# Altium PCB QV-601-Contril.pcbdoc (part 2 of 2)
Units mm, origin at the board's own origin, x right, y up, seen from the top; angles counter-clockwise.
Board outline 150.03 x 60.03 mm, 2 copper layers (TOP, BOTTOM), stack 0.264 mm thick; 44 components, 19 nets, 132 pads, 668 vias.
Unrouted connection lines stored in the file: 3.
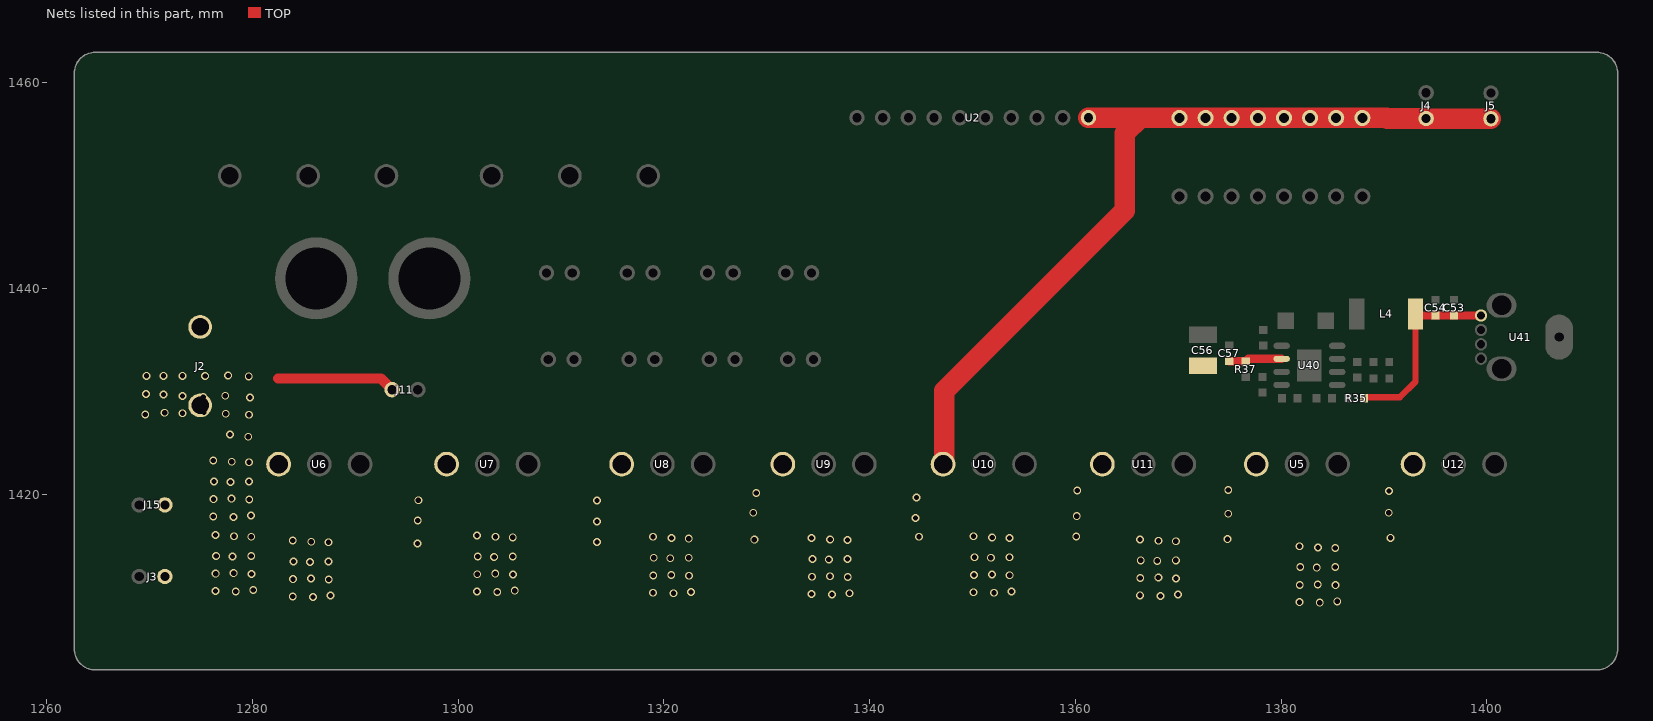
[diagram p2: the nets of this part, all layers, seen from the top]

## Via types
v1: diameter 0.762, hole 0.508, TOP to BOTTOM, 661 vias
v2: diameter 0.54, hole 0.254, TOP to BOTTOM, 7 vias

## Nets (pads, with @x,y where several pads share a name; then routed paths per layer and width w, separated by ;. In a path a pad name is that pad's centre, name@x,y a point inside that pad or via, vN(x,y) a via of type N, cw(c..) or ccw(c..) an arc to the next point about the centre after c; other vN are vias at no path point) (continued)
V+: ?.1 ?.2 ?.3 ?.4 ?.5 ?.6 ?.7 ?.8 C56.1 C57.1 J2.1 J2.2 J3.1 J4.1 J5.1 J11.2 J15.1 R37.2 U2.1 U5.1 U6.1 U7.1 U8.1 U9.1 U10.1 U11.1 U12.1 U40.2 | length 97.5
  TOP w0.8: C57.1@1374.973,1432.939 R37.2@1376.573,1432.939 1376.801,1433.167 U40.2@1380.053,1433.167
  TOP w1: 1282.491,1431.262 1292.488,1431.262 J11.2@1293.58,1430.17
  TOP w2: U10.1@1347.137,1422.931 1347.261,1423.056 1347.261,1430.043 1364.787,1447.569 1364.787,1455.093 1366.281,1456.586 ; U2.1@1361.27,1456.612 1361.295,1456.586 1366.281,1456.586 ; J5.1@1400.398,1456.51 1394.124,1456.51 J4.1@1394.099,1456.535 1390.342,1456.535 1390.291,1456.586 ?.1@1387.901,1456.586 ?.3@1382.821,1456.586 1366.281,1456.586
  other v1: 1383.765,1409.466 1381.784,1409.517 1385.467,1409.593 1285.899,1410.025 1283.918,1410.076 1368.271,1410.127 1287.601,1410.152 1366.29,1410.177 1336.343,1410.254 1369.973,1410.254 1334.362,1410.304 1320.925,1410.381 1338.045,1410.381 1318.944,1410.431 1352.091,1410.431 1350.11,1410.482 1303.806,1410.508 1322.627,1410.508 1278.38,1410.558 1301.825,1410.558 1353.793,1410.558 1276.399,1410.609 1305.508,1410.635 1280.082,1410.685 1385.289,1411.168 1381.809,1411.193 1383.562,1411.244 1287.423,1411.727 1283.943,1411.752 1285.696,1411.803 1369.795,1411.828 1366.315,1411.854 1368.068,1411.905 1337.867,1411.955 1334.387,1411.981 1336.14,1412.032 1322.449,1412.082 1318.97,1412.108 1353.615,1412.133 1320.722,1412.159 1350.135,1412.159 1305.33,1412.209 1351.888,1412.209 1301.85,1412.235 1279.904,1412.26 1276.425,1412.286 1303.603,1412.286 1278.177,1412.336 1383.46,1412.87 1381.86,1412.921 1385.264,1412.921 1285.594,1413.429 1283.994,1413.479 1287.397,1413.479 1367.966,1413.53 1366.366,1413.581 1369.77,1413.581 1336.038,1413.657 1334.438,1413.708 1337.842,1413.708 1320.621,1413.784 1319.02,1413.835 1322.424,1413.835 1351.786,1413.835 1350.186,1413.886 1353.59,1413.886 1303.501,1413.911 1278.076,1413.962 1301.901,1413.962 1305.304,1413.962 1276.475,1414.013 1279.879,1414.013 1385.264,1414.775 1383.587,1414.826 1381.784,1414.953 1296.055,1415.21 1287.397,1415.334 1313.505,1415.362 1285.721,1415.384 1369.77,1415.435 1368.093,1415.486 1283.918,1415.511 1337.842,1415.562 1328.795,1415.591 1336.165,1415.613 1366.29,1415.613 1374.795,1415.641 1322.424,1415.689 1320.748,1415.74 1334.362,1415.74 1353.59,1415.74 1390.644,1415.768 1351.913,1415.791 1305.304,1415.816 1279.879,1415.867 1303.628,1415.867 1318.944,1415.867 1344.797,1415.87 1360.088,1415.895 1278.203,1415.918 1350.11,1415.918 1301.825,1415.994 1276.399,1416.045 1313.505,1417.343 1296.08,1417.445 1344.467,1417.699 1278.173,1417.8 1276.192,1417.851 1360.139,1417.877 1279.875,1417.927 1374.871,1418.105 1328.694,1418.207 1390.467,1418.207 1313.505,1419.401 1296.131,1419.426 1279.697,1419.502 1276.217,1419.528 1277.97,1419.578 1344.569,1419.68 1328.973,1420.137 1390.492,1420.315 1360.19,1420.366 1374.871,1420.417 1277.868,1421.204 1276.268,1421.255 1279.672,1421.255 1279.672,1423.109 1277.995,1423.16 1276.192,1423.287 1279.596,1425.598 1277.818,1425.827 1279.672,1427.732 1269.588,1427.757 1277.411,1427.833 1273.195,1427.884 1271.468,1427.935 1275.303,1427.96 1279.773,1429.408 1275.227,1429.459 1273.195,1429.561 1277.36,1429.586 1271.366,1429.713 1269.664,1429.738 1279.646,1431.466 1275.405,1431.491 1269.715,1431.516 1271.366,1431.516 1273.195,1431.516 1277.64,1431.542
VCC_5V: C53.1 C54.1 L4.2 R35.2 U41.1 | length 18.7
  TOP w0.6: R35.2@1388.054,1429.332 1388.155,1429.434 1391.559,1429.434 1393.068,1430.943 L4.2@1393.068,1437.536
  TOP w0.8: L4.2@1393.068,1437.536 1393.22,1437.384 C54.1@1395.013,1437.384 C53.1@1396.817,1437.384 U41.1@1399.433,1437.384
pads on no net: U41.2 U41.3

## Polygon pours and split planes (outlines as drawn)
no net on Bottom Solder (solid): 1269.005,1406.949 ccw(c1266.705,1406.949) 1266.705,1409.249 ccw(c1266.705,1406.949) 1264.405,1406.949 ccw(c1266.705,1406.949) 1266.705,1404.649 ccw(c1266.705,1406.949) 1269.005,1406.949
no net on Bottom Solder (solid): 1411.005,1406.949 ccw(c1408.705,1406.949) 1408.705,1409.249 ccw(c1408.705,1406.949) 1406.405,1406.949 ccw(c1408.705,1406.949) 1408.705,1404.649 ccw(c1408.705,1406.949) 1411.005,1406.949
no net on Bottom Solder (solid): 1411.005,1458.949 ccw(c1408.705,1458.949) 1408.705,1461.249 ccw(c1408.705,1458.949) 1406.405,1458.949 ccw(c1408.705,1458.949) 1408.705,1456.649 ccw(c1408.705,1458.949) 1411.005,1458.949
no net on Bottom Solder (solid): 1269.005,1458.949 ccw(c1266.705,1458.949) 1266.705,1461.249 ccw(c1266.705,1458.949) 1264.405,1458.949 ccw(c1266.705,1458.949) 1266.705,1456.649 ccw(c1266.705,1458.949) 1269.005,1458.949
no net on Top Solder (solid): 1269.005,1406.949 ccw(c1266.705,1406.949) 1266.705,1409.249 ccw(c1266.705,1406.949) 1264.405,1406.949 ccw(c1266.705,1406.949) 1266.705,1404.649 ccw(c1266.705,1406.949) 1269.005,1406.949
no net on Top Solder (solid): 1411.005,1406.949 ccw(c1408.705,1406.949) 1408.705,1409.249 ccw(c1408.705,1406.949) 1406.405,1406.949 ccw(c1408.705,1406.949) 1408.705,1404.649 ccw(c1408.705,1406.949) 1411.005,1406.949
no net on Top Solder (solid): 1411.005,1458.949 ccw(c1408.705,1458.949) 1408.705,1461.249 ccw(c1408.705,1458.949) 1406.405,1458.949 ccw(c1408.705,1458.949) 1408.705,1456.649 ccw(c1408.705,1458.949) 1411.005,1458.949
no net on Top Solder (solid): 1269.005,1458.949 ccw(c1266.705,1458.949) 1266.705,1461.249 ccw(c1266.705,1458.949) 1264.405,1458.949 ccw(c1266.705,1458.949) 1266.705,1456.649 ccw(c1266.705,1458.949) 1269.005,1458.949
N62837 on TOP "TOP-N62837" (solid, pour order 0): 1384.802,1434.133 1386.631,1434.133 1388.231,1435.733 1388.231,1439.06 1388.054,1439.238 1386.682,1439.238 1386.403,1438.959 1386.403,1435.733 1385.437,1434.768 1384.625,1434.768 1384.625,1434.31 1384.802,1434.133
V+ on TOP "TOP-V+" (solid, pour order 2): 1373.169,1424.074 1373.169,1428.087 1370.934,1430.323 1370.934,1433.396 1375.76,1433.396 1375.76,1423.82 1375.811,1423.769 1375.811,1423.388 1373.855,1423.388 1373.169,1424.074
V+ on TOP "TOP-V+ 1" (solid, pour order 6): 1394.556,1406.472 1391.94,1403.856 1275.049,1403.856 1270.756,1408.148 1270.756,1421.661 1269.588,1422.83 1266.946,1422.83 1266.286,1423.49 1266.286,1438.4 1278.884,1438.4 1284.32,1432.964 1284.32,1420.747 1294.404,1420.747 1294.404,1424.049 1295.013,1424.658 1300.22,1424.658 1300.525,1424.354 1300.525,1420.747 1311.447,1420.747 1311.447,1424.15 1312.057,1424.76 1317.264,1424.76 1317.569,1424.455 1317.569,1420.747 1327.195,1420.747 1327.195,1424.074 1327.805,1424.684 1333.012,1424.684 1333.317,1424.379 1333.317,1420.747 1342.74,1420.747 1342.74,1424.1 1343.35,1424.709 1348.557,1424.709 1348.861,1424.404 1348.861,1420.747 1358.005,1420.747 1358.005,1424.125 1358.615,1424.735 1363.822,1424.735 1364.127,1424.43 1364.127,1420.747 1373.169,1420.747 1373.169,1424.074 1373.779,1424.684 1378.986,1424.684 1379.291,1424.379 1379.291,1420.747 1388.13,1420.747 1389.247,1421.864 1389.247,1424.328 1390.238,1425.319 1393.718,1425.319 1394.556,1424.481 1394.556,1406.472
N41242 on TOP "TOP-N41242" (solid, pour order 8): 1289.603,1436.647 1284.142,1436.647 1280.51,1440.279 1280.492,1440.272 1279.342,1441.422 1265.753,1441.422 1265.753,1448.636 1275.405,1458.288 1295.14,1458.288 1296.639,1456.789 1296.639,1449.881 1294.582,1447.823 1294.556,1447.823 1291.28,1444.547 1291.28,1438.324 1289.603,1436.647
GND on TOP "TOP-GND" (solid, pour order 12): 321 vertices, not listed, extent 1262.905,1403.149 1412.505,1462.749
GND on TOP "TOP-GND 1" (solid, pour order 14): 1390.086,1429.937 1390.086,1433.269 1392.564,1433.269 1392.564,1431.151 1391.35,1429.937 1390.086,1429.937
V+ on BOTTOM "BOTTOM-V+" (solid, pour order 4): 1394.556,1406.447 1391.991,1403.881 1275.024,1403.881 1270.934,1407.971 1270.934,1421.483 1269.588,1422.83 1266.946,1422.83 1266.286,1423.49 1266.286,1438.4 1278.91,1438.4 1284.32,1432.99 1284.32,1420.747 1294.404,1420.747 1294.404,1424.049 1295.013,1424.658 1299.916,1424.658 1300.195,1424.379 1300.195,1420.747 1311.447,1420.747 1311.447,1424.15 1312.057,1424.76 1317.264,1424.76 1317.569,1424.455 1317.569,1420.747 1327.195,1420.747 1327.195,1424.074 1327.805,1424.684 1333.012,1424.684 1333.317,1424.379 1333.317,1420.747 1342.74,1420.747 1342.74,1424.1 1343.35,1424.709 1348.557,1424.709 1348.861,1424.404 1348.861,1420.747 1358.005,1420.747 1358.005,1424.125 1358.615,1424.735 1363.822,1424.735 1364.127,1424.43 1364.127,1420.747 1373.169,1420.747 1373.169,1424.074 1373.779,1424.684 1378.986,1424.684 1379.291,1424.379 1379.291,1420.747 1388.13,1420.747 1389.247,1421.864 1389.247,1424.328 1390.238,1425.319 1393.718,1425.319 1394.556,1424.481 1394.556,1406.447
GND on BOTTOM "BOTTOM-GND" (solid, pour order 10): 1326.611,1423.363 1326.611,1421.534 1325.824,1421.534 1325.824,1423.363 1326.611,1423.363
GND on BOTTOM "BOTTOM-GND 1" (solid, pour order 16): 1356.558,1421.525 1356.558,1425.268 1357.243,1425.268 1357.715,1425.74 1357.716,1425.74 1357.719,1425.743 1357.721,1425.747 1357.724,1425.751 1357.726,1425.755 1357.727,1425.759 1357.729,1425.763 1357.73,1425.767 1357.73,1425.772 1357.73,1425.776 1357.73,1425.78 1357.73,1425.785 1357.729,1425.789 1357.727,1425.793 1357.726,1425.797 1357.724,1425.801 1357.721,1425.805 1357.719,1425.809 1357.716,1425.812 1357.712,1425.815 1357.709,1425.818 1357.705,1425.82 1357.701,1425.822 1357.697,1425.824 1357.693,1425.825 1357.688,1425.826 1357.684,1425.827 1357.68,1425.827 1356.253,1425.827 1356.253,1428.951 1352.646,1432.558 1346.575,1432.558 1342.664,1436.469 1342.664,1436.901 1343.045,1437.282 1357.269,1437.282 1357.904,1436.647 1357.904,1432.532 1363.162,1427.275 1368.826,1427.275 1369.435,1426.665 1369.435,1425.268 1368.953,1425.268 1368.953,1421.534 1364.813,1421.534 1364.813,1425.192 1357.548,1425.192 1357.548,1421.525 1356.558,1421.525
GND on BOTTOM "BOTTOM-GND 2" (solid, pour order 18): 345 vertices, not listed, extent 1262.905,1403.149 1412.505,1462.749
GND on BOTTOM "BOTTOM-GND 3" (solid, pour order 20): 1380.027,1421.559 1380.027,1425.268 1375.015,1425.268 1375.006,1425.268 1374.997,1425.27 1374.988,1425.271 1374.98,1425.274 1374.972,1425.278 1374.964,1425.282 1374.956,1425.286 1374.949,1425.292 1374.943,1425.298 1374.937,1425.304 1374.931,1425.311 1374.927,1425.319 1374.923,1425.327 1374.919,1425.335 1374.917,1425.343 1374.915,1425.352 1374.913,1425.361 1374.913,1425.37 1374.913,1425.378 1374.915,1425.387 1374.917,1425.396 1374.919,1425.404 1374.923,1425.413 1374.927,1425.42 1374.931,1425.428 1374.937,1425.435 1374.943,1425.441 1375.241,1425.74 1375.242,1425.74 1375.245,1425.743 1375.247,1425.747 1375.25,1425.751 1375.252,1425.755 1375.253,1425.759 1375.255,1425.763 1375.256,1425.767 1375.256,1425.772 1375.256,1425.776 1375.256,1425.78 1375.256,1425.785 1375.255,1425.789 1375.253,1425.793 1375.252,1425.797 1375.25,1425.801 1375.247,1425.805 1375.245,1425.809 1375.242,1425.812 1375.238,1425.815 1375.235,1425.818 1375.231,1425.82 1375.227,1425.822 1375.223,1425.824 1375.219,1425.825 1375.214,1425.826 1375.21,1425.827 1375.206,1425.827 1371.798,1425.827 1371.798,1428.113 1369.969,1429.942 1363.898,1429.942 1360.114,1433.726 1360.114,1436.927 1360.495,1437.308 1377.462,1437.308 1384.04,1443.886 1388.587,1443.886 1388.943,1444.242 1402.659,1444.242 1403.294,1443.607 1403.294,1430.094 1401.998,1428.799 1385.996,1428.799 1383.786,1426.589 1383.786,1421.559 1380.027,1421.559

## Keep-outs
Keep-Out Layer:
  circle w0.025: c1266.705,1406.949 r1.65
  circle w0.025: c1408.705,1406.949 r1.65
  circle w0.025: c1408.705,1458.949 r1.65
  circle w0.025: c1266.705,1458.949 r1.65
  lines w0.025: 1262.705,1404.949 ccw(c1264.705,1404.949) 1264.705,1402.949 ; 1262.705,1404.949 ccw(c1264.705,1404.949) 1264.705,1402.949 ; 1262.705,1404.949 1262.705,1460.949 ; 1262.705,1404.949 1262.705,1460.949 ; 1262.705,1460.949 cw(c1264.705,1460.949) 1264.705,1462.949 ; 1262.705,1460.949 cw(c1264.705,1460.949) 1264.705,1462.949 ; 1264.705,1402.949 1410.705,1402.949 ; 1264.705,1402.949 1410.705,1402.949 ; 1264.705,1462.949 1410.705,1462.949 ; 1264.705,1462.949 1410.705,1462.949 ; 1410.705,1402.949 ccw(c1410.705,1404.949) 1412.705,1404.949 ; 1410.705,1402.949 ccw(c1410.705,1404.949) 1412.705,1404.949 ; 1410.705,1462.949 cw(c1410.705,1460.949) 1412.705,1460.949 ; 1410.705,1462.949 cw(c1410.705,1460.949) 1412.705,1460.949 ; 1412.705,1404.949 1412.705,1460.949 ; 1412.705,1404.949 1412.705,1460.949

## Silkscreen, mask and mechanical layers (free items; w line width, h text height)
Top Overlay:
  text "7" at 1381.912,1461.331 h1.27 r270
  text "1" at 1384.655,1461.331 h1.27 r270
  text "6" at 1387.317,1461.336 h1.27 r270
  text "4" at 1379.525,1461.254 h1.27 r270
  text "5" at 1377.086,1461.153 h1.27 r270
  text "2" at 1371.828,1461.102 h1.27 r270
  text "3" at 1374.495,1461.102 h1.27 r270
  text "8" at 1369.466,1461.077 h1.27 r270
  text "QV-601-Control" at 1345.534,1459.99 h1.27
  text "8" at 1344.264,1453.843 h1.27 r270
  text "V-" at 1342.003,1453.818 h1.27 r270
  text "2" at 1346.829,1453.767 h1.27 r270
  text "3" at 1349.369,1453.767 h1.27 r270
  text "5" at 1351.859,1453.64 h1.27 r270
  text "4" at 1354.399,1453.538 h1.27 r270
  text "7" at 1356.939,1453.538 h1.27 r270
  text "1" at 1359.656,1453.487 h1.27 r270
  text "6" at 1361.892,1453.487 h1.27 r270
  text "V+" at 1364.482,1453.462 h1.27 r270
  text "FAN1" at 1399.382,1452.471 h1.27
  text "FAN2" at 1391.737,1452.344 h1.27
  text "GND" at 1323.487,1448.204 h1.27
  text "7" at 1382.005,1446.727 h1.27 r270
  text "1" at 1384.748,1446.727 h1.27 r270
  text "6" at 1387.41,1446.733 h1.27 r270
  text "4" at 1379.618,1446.651 h1.27 r270
  text "5" at 1377.179,1446.549 h1.27 r270
  text "2" at 1371.921,1446.498 h1.27 r270
  text "3" at 1374.588,1446.498 h1.27 r270
  text "8" at 1369.559,1446.473 h1.27 r270
  text "Chaarger" at 1266.616,1446.071 h1.27
  text "3" at 1324.782,1444.826 h1.27
  text "8" at 1309.136,1444.699 h1.27
  text "2" at 1317.213,1444.623 h1.27
  text "5" at 1332.402,1444.623 h1.27
  text "IN BAT" at 1272.128,1439.517 h1.27
  text "1" at 1325.443,1436.495 h1.27
  text "6" at 1332.682,1436.393 h1.27
  text "4" at 1309.466,1436.342 h1.27
  text "7" at 1317.518,1436.317 h1.27
  text "EXT BAT" at 1279.672,1434.514 h1.27 r270
  text "POWER" at 1291.661,1426.386 h1.27
  text "FAN4" at 1264.127,1420.34 h1.27 r270
  text "2" at 1302.938,1416.734 h1.27
  text "3" at 1319.651,1416.657 h1.27
  text "6" at 1396.867,1416.632 h1.27
  text "5" at 1335.653,1416.581 h1.27
  text "4" at 1350.919,1416.556 h1.27
  text "7" at 1366.057,1416.454 h1.27
  text "1" at 1381.119,1416.378 h1.27
  text "8" at 1285.438,1416.251 h1.27
  text "FAN3" at 1264.279,1414.143 h1.27 r270
NCLEGEND-1-2:
  circle w0.025: c1430.484,1383.856 r3
  circle w0.025: c1430.484,1428.856 r0.4
  circle w0.025: c1430.484,1446.856 r0.013
  lines w0.025: 1419.067,1370.356 1541.901,1370.356 ; 1419.067,1379.356 1541.901,1379.356 ; 1419.067,1388.356 1541.901,1388.356 ; 1419.067,1397.356 1541.901,1397.356 ; 1419.067,1406.356 1541.901,1406.356 ; 1419.067,1415.356 1541.901,1415.356 ; 1419.067,1424.356 1541.901,1424.356 ; 1419.067,1433.356 1541.901,1433.356 ; 1419.067,1442.356 1541.901,1442.356 ; 1419.067,1451.356 1541.901,1451.356 ; 1419.067,1457.706 1541.901,1457.706 ; 1419.067,1464.056 1541.901,1464.056 ; 1429.584,1392.856 1431.384,1392.856 ; 1429.634,1401.856 1431.334,1401.856 ; 1429.999,1410.856 1430.969,1410.856 ; 1430.034,1419.856 1430.934,1419.856 ; 1430.484,1391.956 1430.484,1393.756 ; 1430.484,1401.006 1430.484,1402.706 ; 1430.484,1410.371 1430.484,1411.341 ; 1430.484,1419.406 1430.484,1420.306 ; 1441.902,1361.356 1441.902,1457.706 ; 1489.933,1361.356 1489.933,1457.706 ; 1522.216,1361.356 1522.216,1457.706 ; 1419.067,1361.356 1541.901,1361.356 1541.901,1470.556 1419.067,1470.556 1419.067,1361.356 ; 1429.634,1364.956 ccw(c1429.634,1365.856) 1429.634,1366.756 1431.334,1366.756 ccw(c1431.334,1365.856) 1431.334,1364.956 1429.634,1364.956 ; 1430.23,1437.602 1430.23,1438.11 1430.738,1438.11 1430.738,1437.602 1430.23,1437.602 ; 1430.234,1373.456 ccw(c1430.234,1374.856) 1430.234,1376.256 1430.734,1376.256 ccw(c1430.734,1374.856) 1430.734,1373.456 1430.234,1373.456
  text "DRILL CHART: TOP to BOTTOM" at 1447.464,1465.794 h3.17
  text "ALL UNITS ARE IN MILLIMETERS" at 1444.924,1459.294 h3.17
  text "FIGURE" at 1422.864,1452.944 h3.17
  text "SIZE" at 1460.837,1452.944 h3.17
  text "PLATED" at 1498.455,1452.944 h3.17
  text "QTY" at 1528.249,1452.944 h3.17
  text "0.254" at 1459.567,1445.269 h3.17
  text "PLATED" at 1498.455,1445.269 h3.17
  text "7" at 1530.789,1445.269 h3.17
  text "0.508" at 1459.567,1436.269 h3.17
  text "PLATED" at 1498.455,1436.269 h3.17
  text "661" at 1528.249,1436.269 h3.17
  text "0.8" at 1462.107,1427.269 h3.17
  text "PLATED" at 1498.455,1427.269 h3.17
  text "4" at 1530.789,1427.269 h3.17
  text "0.9" at 1462.107,1418.269 h3.17
  text "PLATED" at 1498.455,1418.269 h3.17
  text "36" at 1529.519,1418.269 h3.17
  text "0.97" at 1460.837,1409.269 h3.17
  text "PLATED" at 1498.455,1409.269 h3.17
  text "16" at 1529.519,1409.269 h3.17
  text "1.7" at 1462.107,1400.269 h3.17
  text "PLATED" at 1498.455,1400.269 h3.17
  text "8" at 1530.789,1400.269 h3.17
  text "1.8" at 1462.107,1391.269 h3.17
  text "PLATED" at 1498.455,1391.269 h3.17
  text "24" at 1529.519,1391.269 h3.17
  text "6.0" at 1462.107,1382.269 h3.17
  text "PLATED" at 1498.455,1382.269 h3.17
  text "2" at 1530.789,1382.269 h3.17
  text "1.9x1.4" at 1457.027,1373.269 h3.17
  text "PLATED" at 1498.455,1373.269 h3.17
  text "2" at 1530.789,1373.269 h3.17
  text "2.6x0.9" at 1457.027,1364.269 h3.17
  text "PLATED" at 1498.455,1364.269 h3.17
  text "1" at 1530.789,1364.269 h3.17
DXF_321B:
  circle w0.025: c1364.379,1419.965 r0.85
  circle w0.025: c1364.379,1413.965 r0.85
  circle w0.025: c1339.179,1413.965 r0.85
  circle w0.025: c1339.179,1422.965 r0.85
  circle w0.025: c1368.929,1414.352 r1.1
  circle w0.025: c1299.929,1414.352 r1.1
  lines w0.025: 1302.429,1411.052 1302.429,1425.052 ; 1314.879,1425.052 1314.879,1419.052 1319.879,1419.052 1319.879,1425.052 ; 1331.429,1411.052 1331.429,1425.052 ; 1336.429,1411.052 1336.429,1425.052 ; 1349.279,1411.052 1349.279,1425.052 ; 1354.279,1411.052 1354.279,1425.052 ; 1366.429,1411.052 1366.429,1425.052 ; 1294.429,1412.052 ccw(c1295.429,1412.052) 1295.429,1411.052 1373.429,1411.052 ccw(c1373.429,1412.052) 1374.429,1412.052 1374.429,1424.052 ccw(c1373.429,1424.052) 1373.429,1425.052 1295.429,1425.052 ccw(c1295.429,1424.052) 1294.429,1424.052 1294.429,1412.052 ; 1310.329,1413.102 1324.129,1413.102 1324.129,1414.202 1323.579,1414.202 1323.579,1415.702 1323.464,1415.702 1323.464,1415.302 1322.994,1415.302 1322.994,1415.702 1322.864,1415.702 1322.864,1415.302 1322.394,1415.302 1322.394,1415.702 1322.264,1415.702 1322.264,1415.302 1321.794,1415.302 1321.794,1415.702 1321.664,1415.702 1321.664,1415.302 1321.194,1415.302 1321.194,1415.702 1321.064,1415.702 1321.064,1415.302 1320.594,1415.302 1320.594,1415.702 1320.464,1415.702 1320.464,1415.302 1319.994,1415.302 1319.994,1415.702 1319.864,1415.702 1319.864,1415.302 1319.394,1415.302 1319.394,1415.702 1319.264,1415.702 1319.264,1415.302 1318.794,1415.302 1318.794,1415.702 1318.664,1415.702 1318.664,1415.302 1318.194,1415.302 1318.194,1415.702 1318.064,1415.702 1318.064,1415.302 1317.939,1415.302 1317.939,1414.816 1317.819,1414.816 1317.819,1415.302 1317.594,1415.302 1317.594,1415.702 1317.464,1415.702 1317.464,1415.302 1316.994,1415.302 1316.994,1415.702 1316.864,1415.702 1316.864,1415.302 1316.639,1415.302 1316.639,1414.816 1316.519,1414.816 1316.519,1415.302 1316.394,1415.302 1316.394,1415.702 1316.264,1415.702 1316.264,1415.302 1315.794,1415.302 1315.794,1415.702 1315.664,1415.702 1315.664,1415.302 1315.194,1415.302 1315.194,1415.702 1315.064,1415.702 1315.064,1415.302 1314.594,1415.302 1314.594,1415.702 1314.464,1415.702 1314.464,1415.302 1313.994,1415.302 1313.994,1415.702 1313.864,1415.702 1313.864,1415.302 1313.394,1415.302 1313.394,1415.702 1313.264,1415.702 1313.264,1415.302 1312.794,1415.302 1312.794,1415.702 1312.664,1415.702 1312.664,1415.302 1312.194,1415.302 1312.194,1415.702 1312.064,1415.702 1312.064,1415.302 1311.594,1415.302 1311.594,1415.702 1311.464,1415.702 1311.464,1415.302 1310.994,1415.302 1310.994,1415.702 1310.879,1415.702 1310.879,1414.202 1310.329,1414.202 1310.329,1413.102
DXF_321_TOP:
  drawing of 260 lines, arcs and shapes, not listed
TOP_NEW:
  circle w0.025: c1339.179,1413.961 r0.85
  circle w0.025: c1364.379,1413.961 r0.85
  circle w0.025: c1364.379,1419.961 r0.85
  circle w0.025: c1339.179,1422.961 r0.85
  circle w0.025: c1299.929,1414.348 r1.1
  circle w0.025: c1368.929,1414.348 r1.1
  circle w0.025: c1326.879,1416.748 r2.05
  circle w0.025: c1307.879,1416.748 r2.05
  circle w0.025: c1339.179,1413.961 r0.85
  circle w0.025: c1364.379,1413.961 r0.85
  circle w0.025: c1364.379,1419.961 r0.85
  circle w0.025: c1339.179,1422.961 r0.85
  circle w0.025: c1299.929,1414.348 r1.1
  circle w0.025: c1368.929,1414.348 r1.1
  circle w0.025: c1326.879,1416.748 r2.05
  circle w0.025: c1307.879,1416.748 r2.05
  lines w0.025: 1294.429,1412.048 ccw(c1295.429,1412.048) 1295.429,1411.048 ; 1294.429,1412.048 ccw(c1295.429,1412.048) 1295.429,1411.048 ; 1294.429,1412.048 1294.429,1424.048 ; 1294.429,1412.048 1294.429,1424.048 ; 1294.429,1424.048 cw(c1295.429,1424.048) 1295.429,1425.048 ; 1294.429,1424.048 cw(c1295.429,1424.048) 1295.429,1425.048 ; 1295.429,1411.048 1373.429,1411.048 ; 1295.429,1411.048 1373.429,1411.048 ; 1295.429,1425.048 1373.429,1425.048 ; 1295.429,1425.048 1373.429,1425.048 ; 1337.179,1412.961 1337.179,1423.961 ; 1337.179,1412.961 1366.379,1412.961 ; 1337.179,1412.961 1337.179,1423.961 ; 1337.179,1412.961 1366.379,1412.961 ; 1337.179,1423.961 1344.179,1423.961 ; 1337.179,1423.961 1344.179,1423.961 ; 1342.379,1414.161 1342.379,1419.761 ; 1342.379,1414.161 1347.129,1414.161 ; 1342.379,1414.161 1342.379,1419.761 ; 1342.379,1414.161 1347.129,1414.161 ; 1342.379,1419.761 1347.129,1419.761 ; 1342.379,1419.761 1347.129,1419.761 ; 1342.929,1414.713 1342.929,1419.21 ; 1342.929,1414.713 1344.629,1414.713 ; 1342.929,1414.713 1342.929,1419.21 ; 1342.929,1414.713 1344.629,1414.713 ; 1342.929,1419.21 1344.629,1419.21 ; 1342.929,1419.21 1344.629,1419.21 ; 1344.179,1420.961 1344.179,1423.961 ; 1344.179,1420.961 1366.379,1420.961 ; 1344.179,1420.961 1344.179,1423.961 ; 1344.179,1420.961 1366.379,1420.961 ; 1344.629,1414.713 1344.629,1419.21 ; 1344.629,1414.713 1344.629,1419.21 ; 1347.129,1414.161 1347.129,1419.761 ; 1347.129,1414.161 1347.129,1419.761 ; 1348.429,1414.161 1348.429,1419.761 ; 1348.429,1414.161 1355.129,1414.161 ; 1348.429,1414.161 1348.429,1419.761 ; 1348.429,1414.161 1355.129,1414.161 ; 1348.429,1419.761 1355.129,1419.761 ; 1348.429,1419.761 1355.129,1419.761 ; 1350.929,1414.713 1350.929,1419.21 ; 1350.929,1414.713 1352.629,1414.713 ; 1350.929,1414.713 1350.929,1419.21 ; 1350.929,1414.713 1352.629,1414.713 ; 1350.929,1419.21 1352.629,1419.21 ; 1350.929,1419.21 1352.629,1419.21 ; 1352.629,1414.713 1352.629,1419.21 ; 1352.629,1414.713 1352.629,1419.21 ; 1355.129,1414.161 1355.129,1419.761 ; 1355.129,1414.161 1355.129,1419.761 ; 1356.429,1414.161 1356.429,1419.761 ; 1356.429,1414.161 1361.179,1414.161 ; 1356.429,1414.161 1356.429,1419.761 ; 1356.429,1414.161 1361.179,1414.161 ; 1356.429,1419.761 1361.179,1419.761 ; 1356.429,1419.761 1361.179,1419.761 ; 1358.929,1414.713 1358.929,1419.21 ; 1358.929,1414.713 1360.629,1414.713 ; 1358.929,1414.713 1358.929,1419.21 ; 1358.929,1414.713 1360.629,1414.713 ; 1358.929,1419.21 1360.629,1419.21 ; 1358.929,1419.21 1360.629,1419.21 ; 1360.629,1414.713 1360.629,1419.21 ; 1360.629,1414.713 1360.629,1419.21 ; 1361.179,1414.161 1361.179,1419.761 ; 1361.179,1414.161 1361.179,1419.761 ; 1366.379,1412.961 1366.379,1420.961 ; 1366.379,1412.961 1366.379,1420.961 ; 1373.429,1411.048 ccw(c1373.429,1412.048) 1374.429,1412.048 ; 1373.429,1411.048 ccw(c1373.429,1412.048) 1374.429,1412.048 ; 1373.429,1425.048 cw(c1373.429,1424.048) 1374.429,1424.048 ; 1373.429,1425.048 cw(c1373.429,1424.048) 1374.429,1424.048 ; 1374.429,1412.048 1374.429,1424.048 ; 1374.429,1412.048 1374.429,1424.048 ; 1297.429,1411.048 1297.429,1425.048 1297.429,1411.048 ; 1331.429,1411.048 1331.429,1425.048 1331.429,1411.048 ; 1336.429,1411.048 1336.429,1425.048 1336.429,1411.048 ; 1363.529,1419.961 ccw(c1364.379,1419.961) 1363.747,1419.392 cw(c1364.379,1419.961) 1363.529,1419.961 ; 1367.829,1414.348 ccw(c1368.929,1414.348) 1367.953,1413.84 cw(c1368.929,1414.348) 1367.829,1414.348 ; 1371.429,1411.048 1371.429,1425.048 1371.429,1411.048
TOPNEW:
  drawing of 175 lines, arcs and shapes, not listed
DXF_320:
  drawing of 201 lines, arcs and shapes, not listed
DRAWING_ORIGIN:
  lines w0.025: 1283.764,1341.524 1284.164,1341.524 ; 1283.964,1341.324 1283.964,1341.724

## Text inside footprints (layer, text, board x,y; h text height)
C52: PIN_NUMBER "1" at 1378.035,1434.463 h0.6 r90; PIN_NUMBER "2" at 1378.035,1435.987 h0.6 r90
C53: PIN_NUMBER "1" at 1396.577,1437.384 h0.6 r90; PIN_NUMBER "2" at 1396.577,1438.908 h0.6 r90
C54: PIN_NUMBER "1" at 1394.773,1437.384 h0.6 r90; PIN_NUMBER "2" at 1394.773,1438.908 h0.6 r90
C56: PIN_NUMBER "1" at 1372.153,1432.482 h0.64 r90; PIN_NUMBER "2" at 1372.153,1435.514 h0.64 r90
C57: PIN_NUMBER "1" at 1374.733,1432.939 h0.6 r90; PIN_NUMBER "2" at 1374.733,1434.463 h0.6 r90
C58: PIN_NUMBER "2" at 1388.754,1431.262 h0.6 r180; PIN_NUMBER "1" at 1390.278,1431.262 h0.6 r180
C59: PIN_NUMBER "2" at 1388.754,1432.863 h0.6 r180; PIN_NUMBER "1" at 1390.278,1432.863 h0.6 r180
D1: PIN_NUMBER "2" at 1380.19,1436.876 h0.64 r180; PIN_NUMBER "1" at 1384.091,1436.876 h0.64 r180
J1: PIN_NUMBER "1" at 1284.429,1440.986 h0.64; PIN_NUMBER "2" at 1295.429,1440.986 h0.64
J2: PIN_NUMBER "1" at 1274.668,1436.266 h0.64 r270; PIN_NUMBER "2" at 1274.668,1428.646 h0.64 r270
J3: PIN_NUMBER "1" at 1271.239,1412.009 h0.64 r180; PIN_NUMBER "2" at 1268.739,1412.009 h0.64 r180
J4: PIN_NUMBER "1" at 1393.845,1456.535 h0.64 r90; PIN_NUMBER "2" at 1393.845,1459.035 h0.64 r90
J5: PIN_NUMBER "1" at 1400.144,1456.51 h0.64 r90; PIN_NUMBER "2" at 1400.144,1459.01 h0.64 r90
J6: PIN_NUMBER "2" at 1310.838,1441.524 h0.64; PIN_NUMBER "1" at 1308.338,1441.524 h0.64
J7: PIN_NUMBER "2" at 1318.686,1441.524 h0.64; PIN_NUMBER "1" at 1316.186,1441.524 h0.64
J8: PIN_NUMBER "2" at 1326.484,1441.524 h0.64; PIN_NUMBER "1" at 1323.984,1441.524 h0.64
J9: PIN_NUMBER "2" at 1334.104,1441.524 h0.64; PIN_NUMBER "1" at 1331.604,1441.524 h0.64
J10: PIN_NUMBER "2" at 1311.015,1433.117 h0.64; PIN_NUMBER "1" at 1308.515,1433.117 h0.64
J11: PIN_NUMBER "2" at 1293.326,1430.17 h0.64 r180; PIN_NUMBER "1" at 1295.826,1430.17 h0.64 r180
J12: PIN_NUMBER "2" at 1318.864,1433.117 h0.64; PIN_NUMBER "1" at 1316.364,1433.117 h0.64
J13: PIN_NUMBER "2" at 1326.662,1433.117 h0.64; PIN_NUMBER "1" at 1324.162,1433.117 h0.64
J14: PIN_NUMBER "2" at 1334.282,1433.117 h0.64; PIN_NUMBER "1" at 1331.782,1433.117 h0.64
J15: PIN_NUMBER "1" at 1271.239,1418.969 h0.64 r180; PIN_NUMBER "2" at 1268.739,1418.969 h0.64 r180
L4: PIN_NUMBER "2" at 1392.814,1437.536 h0.64 r90; PIN_NUMBER "1" at 1387.114,1437.536 h0.64 r90
R35: PIN_NUMBER "2" at 1387.814,1429.332 h0.6; PIN_NUMBER "1" at 1386.29,1429.332 h0.6
R36: PIN_NUMBER "2" at 1384.715,1429.332 h0.6; PIN_NUMBER "1" at 1383.191,1429.332 h0.6
R37: PIN_NUMBER "1" at 1376.333,1431.415 h0.6 r90; PIN_NUMBER "2" at 1376.333,1432.939 h0.6 r90
R38: PIN_NUMBER "2" at 1387.179,1431.339 h0.6 r270; PIN_NUMBER "1" at 1387.179,1432.863 h0.6 r270
R39: PIN_NUMBER "2" at 1377.958,1431.415 h0.6 r90; PIN_NUMBER "1" at 1377.958,1429.891 h0.6 r90
R40: PIN_NUMBER "2" at 1379.838,1429.332 h0.6 r180; PIN_NUMBER "1" at 1381.362,1429.332 h0.6 r180
U1: PIN_NUMBER "1" at 1292.778,1450.973 h0.64 r180; PIN_NUMBER "2" at 1285.158,1450.973 h0.64 r180; PIN_NUMBER "3" at 1277.538,1450.973 h0.64 r180
U2: PIN_NUMBER "9" at 1342.032,1456.612 h0.64 r180; PIN_NUMBER "8" at 1344.532,1456.612 h0.64 r180; PIN_NUMBER "7" at 1347.032,1456.612 h0.64 r180; PIN_NUMBER "6" at 1349.532,1456.612 h0.64 r180; PIN_NUMBER "5" at 1352.032,1456.612 h0.64 r180; PIN_NUMBER "4" at 1354.532,1456.612 h0.64 r180; PIN_NUMBER "3" at 1357.032,1456.612 h0.64 r180; PIN_NUMBER "2" at 1359.532,1456.612 h0.64 r180; PIN_NUMBER "1" at 1362.032,1456.612 h0.64 r180; PIN_NUMBER "10" at 1339.024,1456.612 h0.64 r180
U3: PIN_NUMBER "1" at 1318.229,1450.973 h0.64 r180; PIN_NUMBER "2" at 1310.609,1450.973 h0.64 r180; PIN_NUMBER "3" at 1302.989,1450.973 h0.64 r180
U5: PIN_NUMBER "3" at 1385.257,1422.931 h0.64; PIN_NUMBER "1" at 1377.337,1422.931 h0.64; PIN_NUMBER "2" at 1381.297,1422.931 h0.64
U6: PIN_NUMBER "3" at 1290.21,1422.931 h0.64; PIN_NUMBER "1" at 1282.29,1422.931 h0.64; PIN_NUMBER "2" at 1286.25,1422.931 h0.64
U7: PIN_NUMBER "3" at 1306.543,1422.931 h0.64; PIN_NUMBER "1" at 1298.623,1422.931 h0.64; PIN_NUMBER "2" at 1302.583,1422.931 h0.64
U8: PIN_NUMBER "3" at 1323.561,1422.931 h0.64; PIN_NUMBER "1" at 1315.641,1422.931 h0.64; PIN_NUMBER "2" at 1319.601,1422.931 h0.64
U9: PIN_NUMBER "3" at 1339.232,1422.931 h0.64; PIN_NUMBER "1" at 1331.312,1422.931 h0.64; PIN_NUMBER "2" at 1335.272,1422.931 h0.64
U10: PIN_NUMBER "3" at 1354.803,1422.931 h0.64; PIN_NUMBER "1" at 1346.883,1422.931 h0.64; PIN_NUMBER "2" at 1350.843,1422.931 h0.64
U11: PIN_NUMBER "3" at 1370.297,1422.931 h0.64; PIN_NUMBER "1" at 1362.377,1422.931 h0.64; PIN_NUMBER "2" at 1366.337,1422.931 h0.64
U12: PIN_NUMBER "3" at 1400.497,1422.931 h0.64; PIN_NUMBER "1" at 1392.577,1422.931 h0.64; PIN_NUMBER "2" at 1396.537,1422.931 h0.64
U40: PIN_NUMBER "1" at 1379.993,1434.437 h0.15 r270; PIN_NUMBER "3" at 1379.993,1431.897 h0.15 r270; PIN_NUMBER "6" at 1385.393,1431.897 h0.15 r270; PIN_NUMBER "4" at 1379.993,1430.627 h0.15 r270; PIN_NUMBER "8" at 1385.393,1434.437 h0.15 r270; PIN_NUMBER "5" at 1385.393,1430.627 h0.15 r270; PIN_NUMBER "2" at 1379.993,1433.167 h0.15 r270; PIN_NUMBER "7" at 1385.393,1433.167 h0.15 r270; PIN_NUMBER "9" at 1382.693,1432.532 h0.15 r270; Top Overlay "TPS54360BDDAR" at 1382.953,1433.632 h0.45 r270
U41: PIN_NUMBER "1" at 1398.772,1437.756 h0.64 r180; PIN_NUMBER "4" at 1398.747,1433.514 h0.64 r180; PIN_NUMBER "5" at 1402.195,1432.204 h0.64 r180; PIN_NUMBER "6" at 1402.195,1438.364 h0.64 r180; PIN_NUMBER "7" at 1407.795,1435.284 h0.64 r180; PIN_NUMBER "2" at 1398.747,1436.232 h0.64 r180; PIN_NUMBER "3" at 1398.747,1434.86 h0.64 r180
?: PIN_NUMBER "9" at 1369.867,1448.966 h0.64 r180; PIN_NUMBER "10" at 1372.153,1448.966 h0.64 r180; PIN_NUMBER "11" at 1374.693,1448.966 h0.64 r180; PIN_NUMBER "12" at 1377.233,1448.966 h0.64 r180; PIN_NUMBER "13" at 1379.773,1448.966 h0.64 r180; PIN_NUMBER "14" at 1382.313,1448.966 h0.64 r180; PIN_NUMBER "15" at 1384.853,1448.966 h0.64 r180; PIN_NUMBER "16" at 1387.393,1448.966 h0.64 r180; PIN_NUMBER "1" at 1387.647,1456.586 h0.64 r180; PIN_NUMBER "2" at 1385.107,1456.586 h0.64 r180; PIN_NUMBER "3" at 1382.567,1456.586 h0.64 r180; PIN_NUMBER "4" at 1380.027,1456.586 h0.64 r180; PIN_NUMBER "5" at 1377.487,1456.586 h0.64 r180; PIN_NUMBER "6" at 1374.947,1456.586 h0.64 r180; PIN_NUMBER "8" at 1369.867,1456.586 h0.64 r180; PIN_NUMBER "7" at 1372.407,1456.586 h0.64 r180; Top Overlay "ON" at 1389.247,1451.481 h1.6 r180; Top Overlay "1" at 1388.485,1455.469 h1.6 r180; Top Overlay "2" at 1386.047,1455.443 h1.6 r180; Top Overlay "3" at 1383.405,1455.443 h1.6 r180; Top Overlay "4" at 1380.84,1455.469 h1.6 r180; Top Overlay "5" at 1378.325,1455.57 h1.6 r180; Top Overlay "6" at 1375.76,1455.621 h1.6 r180; Top Overlay "7" at 1373.22,1455.672 h1.6 r180; Top Overlay "8" at 1370.68,1455.672 h1.6 r180; Mechanical 1 "U4" at 1380.459,1451.506 h0.64 r180